# EAGLE board Stereo master section (EAGLE 9.6.2)

Size 100 x 80 mm. Coordinates in mm from the lower left corner, seen from the top.
Outline: 0,0 100,0 100,80 0,80 0,0
Copper layers (1*16): Top 0.035mm / dielectric 1.5mm / Bottom 0.035mm
Design rules "default": minimum track width 6mil, minimum drill 0.35mm, track to track 6mil, track to pad 6mil, pad to pad 6mil, via to via 6mil, smd to smd 6mil, copper to edge 40mil, drill to drill 6mil, minimum pad ring 10mil, minimum via ring 8mil, stop-mask expansion 4mil, vias tented up to drill 0mil, thermal gap 10mil

## Footprints (pad centres in the part's own frame; a part is rotated, then mirrored left to right if it is on the bottom)
DIL08 = drill 0.813 pad 1.27: 1 -3.81,-3.81; 2 -1.27,-3.81; 3 1.27,-3.81; 4 3.81,-3.81; 5 3.81,3.81; 6 1.27,3.81; 7 -1.27,3.81; 8 -3.81,3.81
JP3Q = drill 0.914 octagon: 1 -2.54,-1.27; 2 -2.54,1.27; 3 0,-1.27; 4 0,1.27; 5 2.54,-1.27; 6 2.54,1.27
JP2 = drill 0.914 long: 1 -2.54,0; 2 0,0; 3 2.54,0
0207/7 = drill 0.813 octagon: 1 -3.81,0; 2 3.81,0
JP1 = drill 0.914 long: 1 0,-1.27; 2 0,1.27

## Placement (x,y rotation side)
IC1  LM358N  [DIL08]  27.94,17.78 0 top
IC2  LM358N  [DIL08]  -19.05,15.24 0 top  (outside the outline)
JP1  [JP3Q]  63.5,20.32 0 top
JP2  [JP2]  -35.56,13.97 0 top  (outside the outline)
JP3  [JP3Q]  -35.56,-5.08 0 top  (outside the outline)
LINE  [JP2]  -17.78,24.13 0 top  (outside the outline)
R1  1k  [0207/7]  -26.67,21.59 0 top  (outside the outline)
R2  1k  [0207/7]  -17.78,29.21 0 top  (outside the outline)
R3  5k  [0207/7]  -27.94,29.21 0 top  (outside the outline)
R4  5k  [0207/7]  -17.78,34.29 0 top  (outside the outline)
R5  1k  [0207/7]  -27.94,34.29 0 top  (outside the outline)
R6  1k  [0207/7]  -17.78,39.37 0 top  (outside the outline)
SYNTH  [JP1]  -27.94,13.97 0 top  (outside the outline)

## Library data of the parts
IC1 IC2 = linear
JP1-JP3 LINE SYNTH = jumper
R1-R6 = rcl; SPICEPREFIX: R

## Nets
N$1: R3.1 R4.1 SYNTH.2
N$2: IC1.2 R1.1 R3.2
N$3: IC2.6 JP1.3 R5.2
N$4: IC1.6 R2.1 R4.2
N$5: IC1.7 LINE.2 R2.2 R5.1
N$6: IC2.2 JP1.4 R6.2
N$7: LINE.1
N$8: LINE.3 R6.1
N$9: IC2.7 JP1.5
N$10: IC2.1 JP1.6
N$11: IC1.8 IC2.8 JP2.3
N$12: IC1.4 IC2.4 JP2.2
N$13: IC1.3 IC1.5 IC2.3 IC2.5 JP1.1 JP1.2 JP2.1 SYNTH.1
N$14: IC1.1 R1.2

## Tracks (layer width: path | path; a pad name or v marks a point on that pad's centre or on a via)
N$1  (2 unrouted)
N$2  (2 unrouted)
N$3  (2 unrouted)
N$4  (2 unrouted)
N$5  (3 unrouted)
N$6  (2 unrouted)
N$8  (1 unrouted)
N$9  (1 unrouted)
N$10  (1 unrouted)
N$11  (2 unrouted)
N$12  (2 unrouted)
N$13  (7 unrouted)
N$14  (1 unrouted)